# EAGLE board Anti thept2ENGINE (EAGLE 7.6.0)
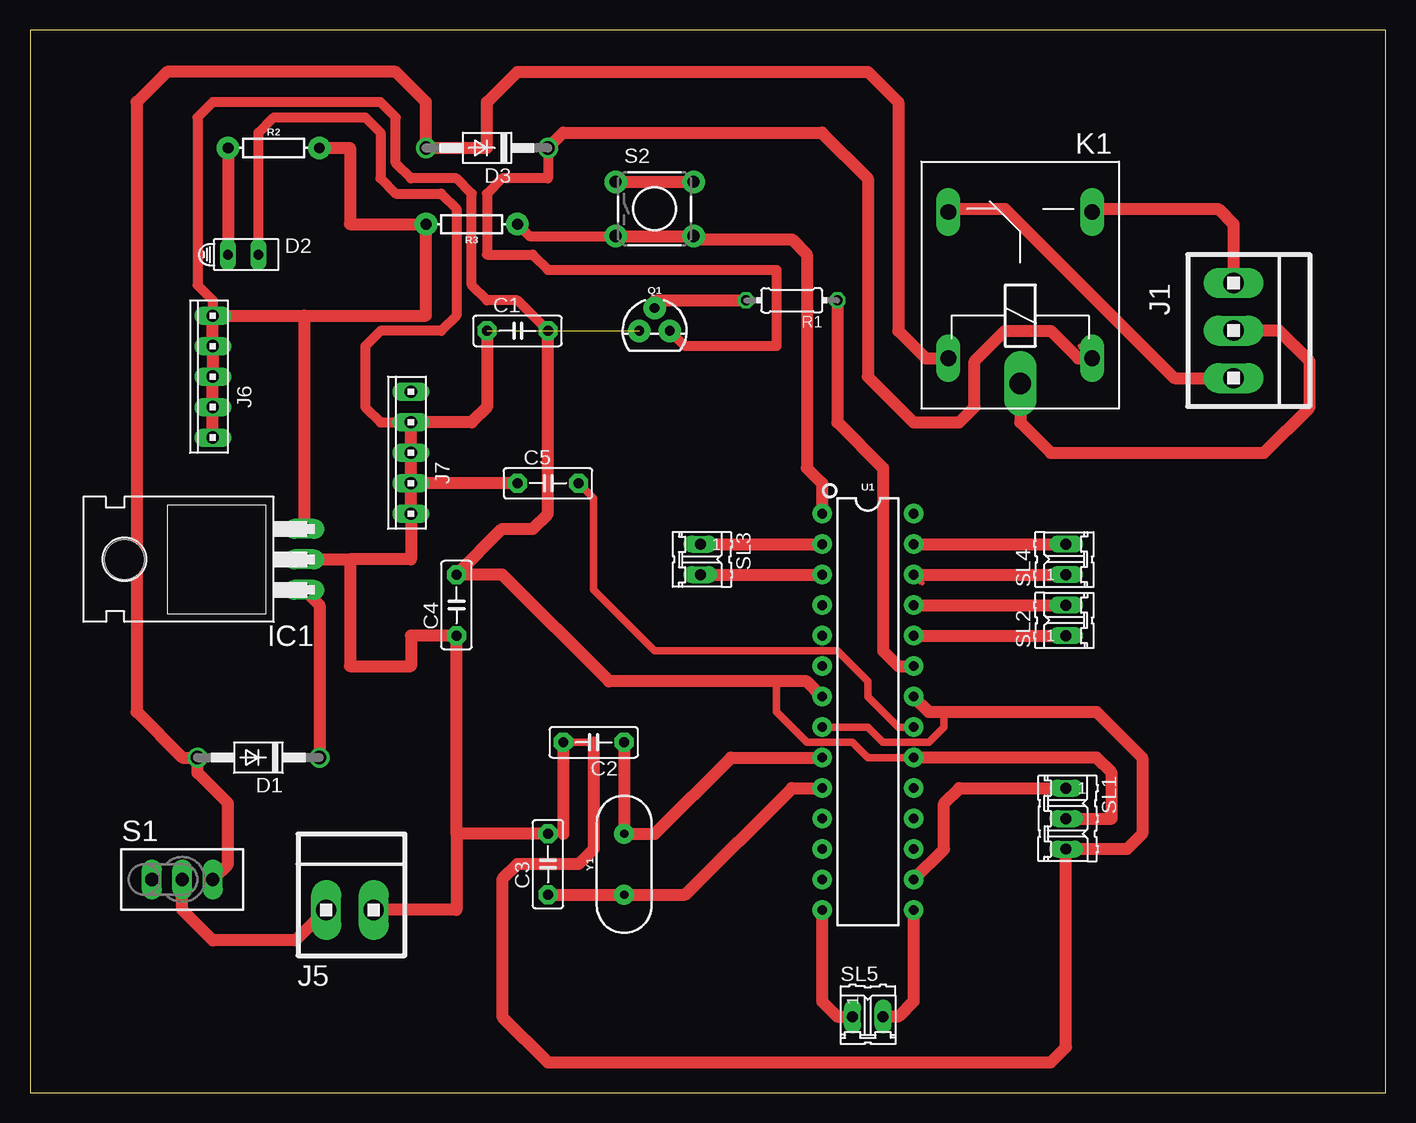
[diagram p0: board, top side]

Size 113.01 x 88.57 mm. Coordinates in mm from the lower left corner, seen from the top.
Outline: 0,0 113.01,0 113.01,88.57 0,88.57 0,0
Copper layers (1*16): Top 0.035mm / dielectric 1.5mm / Bottom 0.035mm
Design rules "default": minimum track width 10mil, minimum drill 24mil, track to track 8mil, track to pad 8mil, pad to pad 8mil, via to via 8mil, smd to smd 8mil, copper to edge 40mil, drill to drill 8mil, minimum pad ring 10mil, minimum via ring 8mil, stop-mask expansion 4mil, vias tented up to drill 0mil, thermal gap 10mil

## Footprints (pad centres in the part's own frame; a part is rotated, then mirrored left to right if it is on the bottom)
C5B2.5 = drill 0.813 pad 1.6 octagon: 1 -2.54,0; 2 2.54,0
DO41-10 = drill 1.118: A 5.08,0; C -5.08,0
HLMP6 = drill 0.813 long: A -1.27,0; K 1.27,0
TO220H = drill 1.118 long: 1 -2.54,-10.16; 2 0,-10.16; 3 2.54,-10.16 | hole 3.302: 0,4.826
1X3MTA = drill 1.676 long: 1 3.937,0; 2 -0.025,0; 3 -3.988,0
1X2MTA = drill 1.676 long: 1 1.981,0; 2 -1.981,0
10X05MTA = drill 1.016 long: 1 5.08,0; 2 2.54,0; 3 0,0; 4 -2.54,0; 5 -5.08,0
ZF112 = drill 1.321 long: 1 -6.096,5.994; 2 -6.096,-5.994; O 6.096,5.994; S 6.096,-5.994 | drill 1.803 long: P -8.204,0
TO-92 = drill 0.813 pad 1.88: 1 -1.27,0; 2 0,1.905; 3 1.27,0
0204/7 = drill 0.813 octagon: 1 -3.81,0; 2 3.81,0
AXIAL-0.3 = drill 0.9 pad 1.88: P$1 -3.81,0; P$2 3.81,0
TL3XPO = drill 1.1 pad 1.422 long: 1 -2.54,0; 2 0,0; 3 2.54,0
TACTILE-PTH = drill 1.016 pad 1.88: 1 -3.251,2.261; 2 3.251,2.261; 3 -3.251,-2.261; 4 3.251,-2.261
03P = drill 0.914 long: 1 -2.54,0; 2 0,0; 3 2.54,0
02P = drill 0.914 long: 1 -1.27,0; 2 1.27,0
DIP28 = drill 0.813 pad 1.626: 1 -16.51,-3.81; 2 -13.97,-3.81; 3 -11.43,-3.81; 4 -8.89,-3.81; 5 -6.35,-3.81; 6 -3.81,-3.81; 7 -1.27,-3.81; 8 1.27,-3.81; 9 3.81,-3.81; 10 6.35,-3.81; 11 8.89,-3.81; 12 11.43,-3.81; 13 13.97,-3.81; 14 16.51,-3.81; 15 16.51,3.81; 16 13.97,3.81; 17 11.43,3.81; 18 8.89,3.81; 19 6.35,3.81; 20 3.81,3.81; 21 1.27,3.81; 22 -1.27,3.81; 23 -3.81,3.81; 24 -6.35,3.81; 25 -8.89,3.81; 26 -11.43,3.81; 27 -13.97,3.81; 28 -16.51,3.81
HC49US = drill 0.7 pad 1.651: 1 -2.54,0; 2 2.54,0

## Placement (x,y rotation side)
C1  [C5B2.5]  40.64,63.5 0 top
C2  [C5B2.5]  46.99,29.21 180 top
C3  [C5B2.5]  43.18,19.05 90 top
C4  [C5B2.5]  35.56,40.64 90 top
C5  [C5B2.5]  43.18,50.8 0 top
D1  1N4004  [DO41-10]  19.05,27.94 180 top
D2  HLMP6  [HLMP6]  17.78,69.85 0 top
D3  1N4004  [DO41-10]  38.1,78.74 180 top
IC1  7805T  [TO220H]  12.7,44.45 90 top
J1  [1X3MTA]  100.33,63.5 270 top
J5  [1X2MTA]  26.67,15.24 0 top
J6  [10X05MTA]  15.24,59.69 90 top
J7  [10X05MTA]  31.75,53.34 90 top
K1  ZF112  [ZF112]  82.55,67.31 90 top
Q1  200mA/40V  [TO-92]  52.07,63.5 0 top
R1  [0204/7]  63.5,66.04 180 top
R2  330  [AXIAL-0.3]  20.32,78.74 0 top
R3  330  [AXIAL-0.3]  36.83,72.39 180 top
S1  TL38PO  [TL3XPO]  12.7,17.78 0 top
S2  [TACTILE-PTH]  52.07,73.66 0 top
SL1  [03P]  86.36,22.86 270 top
SL2  [02P]  86.36,39.37 90 top
SL3  [02P]  55.88,44.45 270 top
SL4  [02P]  86.36,44.45 90 top
SL5  [02P]  69.85,6.35 0 top
U1  328P  [DIP28]  69.85,31.75 270 top
Y1  16MHz  [HC49US]  49.53,19.05 90 top

## Library data of the parts
C1-C5 = capacitor-wima
D1 D3 = diode
D2 = display-hp; MF: AGILENT TECHNOLOGIES; MPN: HLMP-6500; OC_FARNELL: 1652490; OC_NEWARK: 40K0088
IC1 = linear
J1 J5-J7 = con-amp
K1 = relay; OC_FARNELL: unknown; OC_NEWARK: unknown
Q1 = SparkFun-DiscreteSemi; PROD_ID: TRANS-08447
R1 = resistor
R2 R3 = SparkFun-Resistors; PROD_ID: RES-8371
S1 = switch
S2 = SparkFun-Retired
SL1-SL5 = con-amp-quick; OC_FARNELL: unknown; OC_NEWARK: unknown
U1 = SparkFun-IC-Microcontroller; PROD_ID: IC-09136
Y1 = SparkFun-Clocks; PROD_ID: XTAL-08181; SF_ID: COM-00536

## Nets
3.3V: C1.1 C2.2 C3.2 C4.1 C5.1 D2.K IC1.2 J5.1 J7.2 J7.3 J7.4 J7.5 Q1.1 SL1.3 U1.8 U1.22
12V: D1.A D3.A K1.1 S1.3
+5V: C1.2 C4.2 IC1.3 J6.1 J6.2 J6.3 J6.4 J6.5 R2.P$2 R3.P$2 SL1.2 U1.7 U1.20
N$1: J1.1 K1.O
N$2: J1.2 K1.P
N$3: Q1.2 R1.2
N$4: D3.C K1.2 Q1.3
N$5: J1.3 K1.S
N$6: R1.1 U1.23
N$7: D2.A R2.P$1
N$8: C3.1 U1.10 Y1.1
N$9: SL2.1 U1.24
N$10: R3.P$1 S2.3 S2.4 U1.1
N$11: SL2.2 U1.25
N$12: C5.2 U1.21
N$13: SL4.1 U1.26
N$14: J5.2 S1.2
N$15: SL3.1 U1.2
N$16: D1.C IC1.1
N$17: SL3.2 U1.3
N$18: C2.1 U1.9 Y1.2
N$19: SL4.2 U1.27
N$20: SL5.1 U1.14
N$21: S2.1 S2.2
N$22: SL5.2 U1.15
N$23: SL1.1 U1.16

## Tracks (layer width: path | path; a pad name or v marks a point on that pad's centre or on a via)
3.3V  (1 unrouted)
  Top 0.406: 44.45,21.59 C3.2
  Top 0.61: U1.8 69.85,30.48 71.12,29.21 74.93,29.21 76.2,30.48 76.2,31.75 | C2.2 46.99,29.21
  Top 0.813: D2.K 19.05,80.01 20.32,81.28 27.94,81.28 29.21,80.01 29.21,76.2 30.48,74.93 34.29,74.93 35.56,73.66 35.56,64.77 34.29,63.5 29.21,63.5 27.94,62.23 27.94,57.15 29.21,55.88 J7.2
  Top 1.016: IC1.2 26.67,44.45 | 26.67,44.45 26.67,35.56 31.75,35.56 31.75,38.1 C4.1 35.56,21.59 | C3.2 35.56,21.59 | J7.4 J7.3 J7.2 36.83,55.88 38.1,57.15 C1.1 | J7.4 J7.5 31.75,44.45 26.67,44.45 | U1.22 74.93,31.75 76.2,31.75 88.9,31.75 92.71,27.94 92.71,21.59 91.44,20.32 SL1.3 86.36,3.81 85.09,2.54 43.18,2.54 39.37,6.35 39.37,17.78 40.64,19.05 45.72,19.05 46.99,20.32 46.99,29.21 | 35.56,21.59 35.56,15.24 J5.1 27.94,15.24 | C2.2 44.45,21.59 | C5.1 J7.4
12V
  Top 0.406: 76.56,60.96 K1.1
  Top 1.016: K1.1 74.68,61.21 72.39,63.5 72.39,82.55 69.85,85.09 40.64,85.09 38.1,82.55 38.1,78.74 D3.A 33.02,82.55 30.48,85.09 11.43,85.09 8.89,82.55 8.89,31.75 12.7,27.94 D1.A 13.97,26.67 16.51,24.13 16.51,19.05 S1.3
+5V
  Top 0.61: U1.20 69.85,27.94 68.58,29.21 64.77,29.21 62.23,31.75 62.23,34.29
  Top 0.813: C1.2 40.64,66.04 38.1,66.04 36.83,67.31 36.83,74.93 35.56,76.2 31.75,76.2 30.48,77.47 30.48,81.28 29.21,82.55 15.24,82.55 13.97,81.28 13.97,67.31 15.24,66.04 J6.1
  Top 1.016: J6.5 J6.4 J6.3 J6.2 J6.1 22.86,64.77 | 22.86,64.77 IC1.3 | R2.P$2 26.67,78.74 26.67,72.39 R3.P$2 33.02,64.77 22.86,64.77 | SL1.2 90.17,22.86 90.17,26.67 88.9,27.94 U1.20 | U1.7 64.77,34.29 62.23,34.29 48.26,34.29 39.37,43.18 C4.2 39.37,46.99 41.91,46.99 43.18,48.26 C1.2
N$1
  Top 1.016: K1.O 76.81,73.66 81.28,73.66 95.38,59.56 J1.1
N$2
  Top 1.016: K1.P 82.55,55.88 85.09,53.34 102.87,53.34 106.68,57.15 106.68,60.96 104.11,63.52 J1.2
N$3
  Top 0.406: 52.07,66.04 Q1.2
  Top 1.016: 52.07,66.04 R1.2
N$4
  Top 0.406: 87.53,62.23 K1.2
  Top 0.813: D3.C 43.18,76.2 39.37,76.2 38.1,74.93 38.1,69.85 41.91,69.85 43.18,68.58 62.23,68.58 62.23,62.23 54.61,62.23 Q1.3
  Top 1.016: D3.C 44.45,80.01 66.04,80.01 69.85,76.2 69.85,59.69 73.66,55.88 77.47,55.88 78.74,57.15 78.74,60.96 81.28,63.5 85.09,63.5 87.38,61.21 K1.2
N$5
  Top 0.406: 88.8,73.66 K1.S
  Top 1.016: 88.8,73.66 99.06,73.66 100.33,72.39 J1.3
N$6
  Top 1.016: R1.1 67.31,55.88 71.12,52.07 71.12,36.83 72.39,35.56 U1.23
N$7
  Top 1.016: R2.P$1 D2.A
N$8
  Top 1.016: C3.1 Y1.1 54.61,16.51 63.5,25.4 U1.10
N$9
  Top 1.016: U1.24 SL2.1
N$10
  Top 0.813: R3.P$1 41.63,71.4 S2.3
  Top 1.016: S2.3 S2.4 55.6,71.12 63.5,71.12 64.77,69.85 64.77,52.07 66.04,50.8 U1.1
N$11
  Top 1.016: U1.25 SL2.2
N$12
  Top 0.61: C5.2 46.99,49.53 46.99,41.91 52.07,36.83 67.31,36.83 69.85,34.29 69.85,33.02 72.39,30.48 U1.21
N$13
  Top 0.406: 74.37,42.47 U1.26
  Top 1.016: U1.26 SL4.1
N$14
  Top 1.016: J5.2 22.15,12.7 15.24,12.7 12.7,15.24 S1.2
N$15
  Top 1.016: SL3.1 U1.2
N$16
  Top 1.016: IC1.1 24.13,40.64 D1.C
N$17
  Top 1.016: SL3.2 U1.3
N$18
  Top 1.016: C2.1 Y1.2 52.07,21.59 58.42,27.94 U1.9
N$19
  Top 1.016: U1.27 SL4.2
N$20
  Top 1.016: U1.14 66.04,7.62 67.31,6.35 SL5.1
N$21
  Top 0.406: 49.81,75.92 49.53,76.2 49.1,76.2 S2.1
  Top 1.016: 49.81,75.92 S2.2
N$22
  Top 1.016: U1.15 73.66,7.62 72.39,6.35 SL5.2
N$23
  Top 1.016: U1.16 76.2,20.32 76.2,24.13 77.47,25.4 SL1.1